# EAGLE board VistelV3 (EAGLE 6.4)
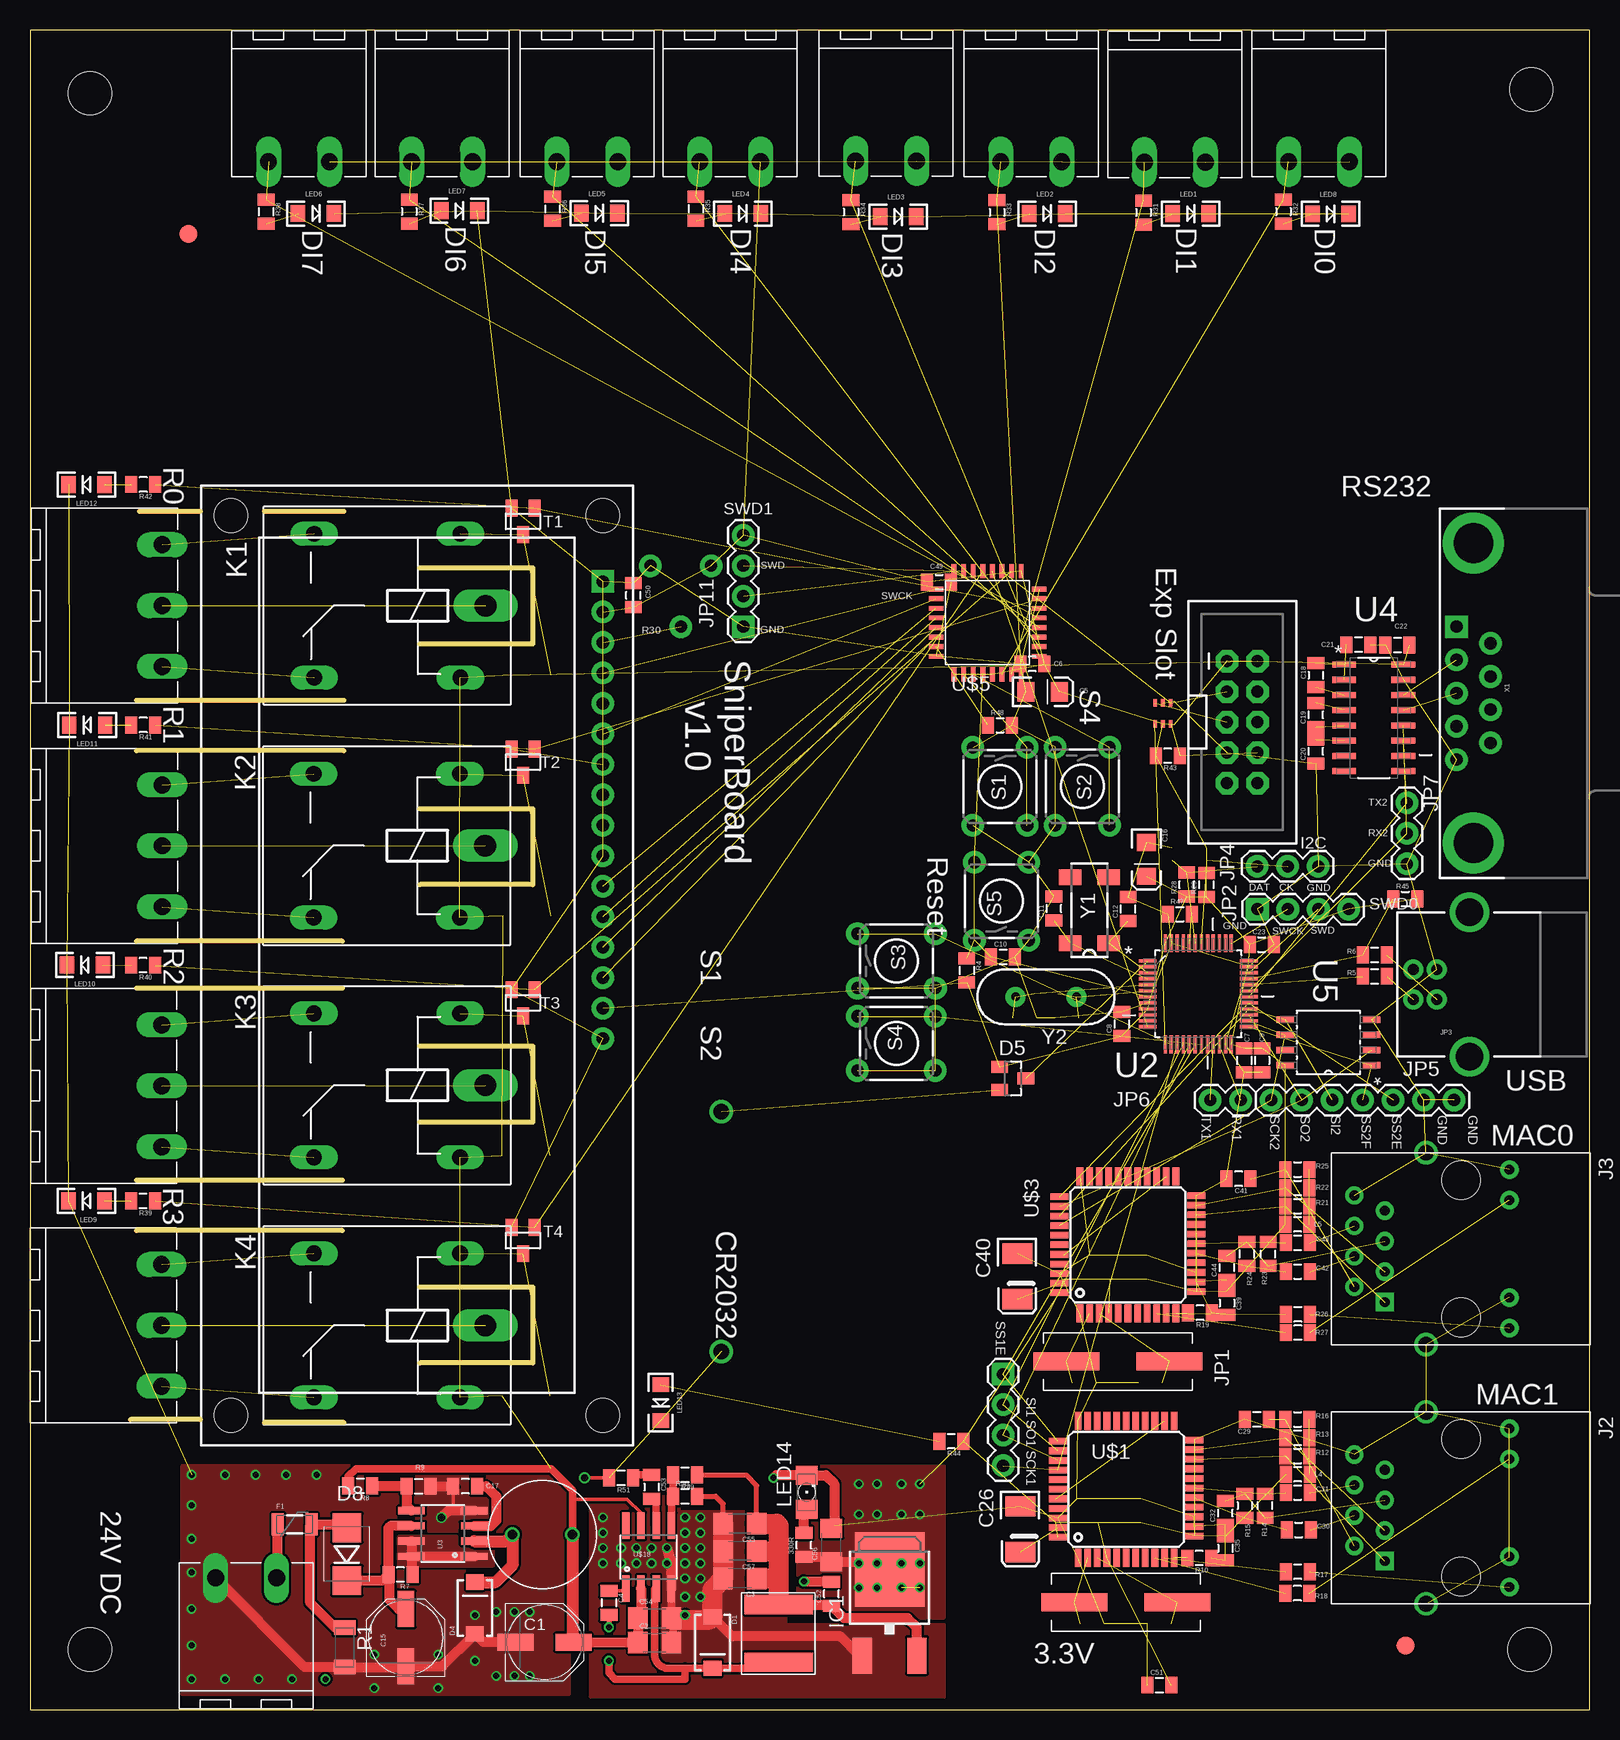
[diagram p0: board, top side]
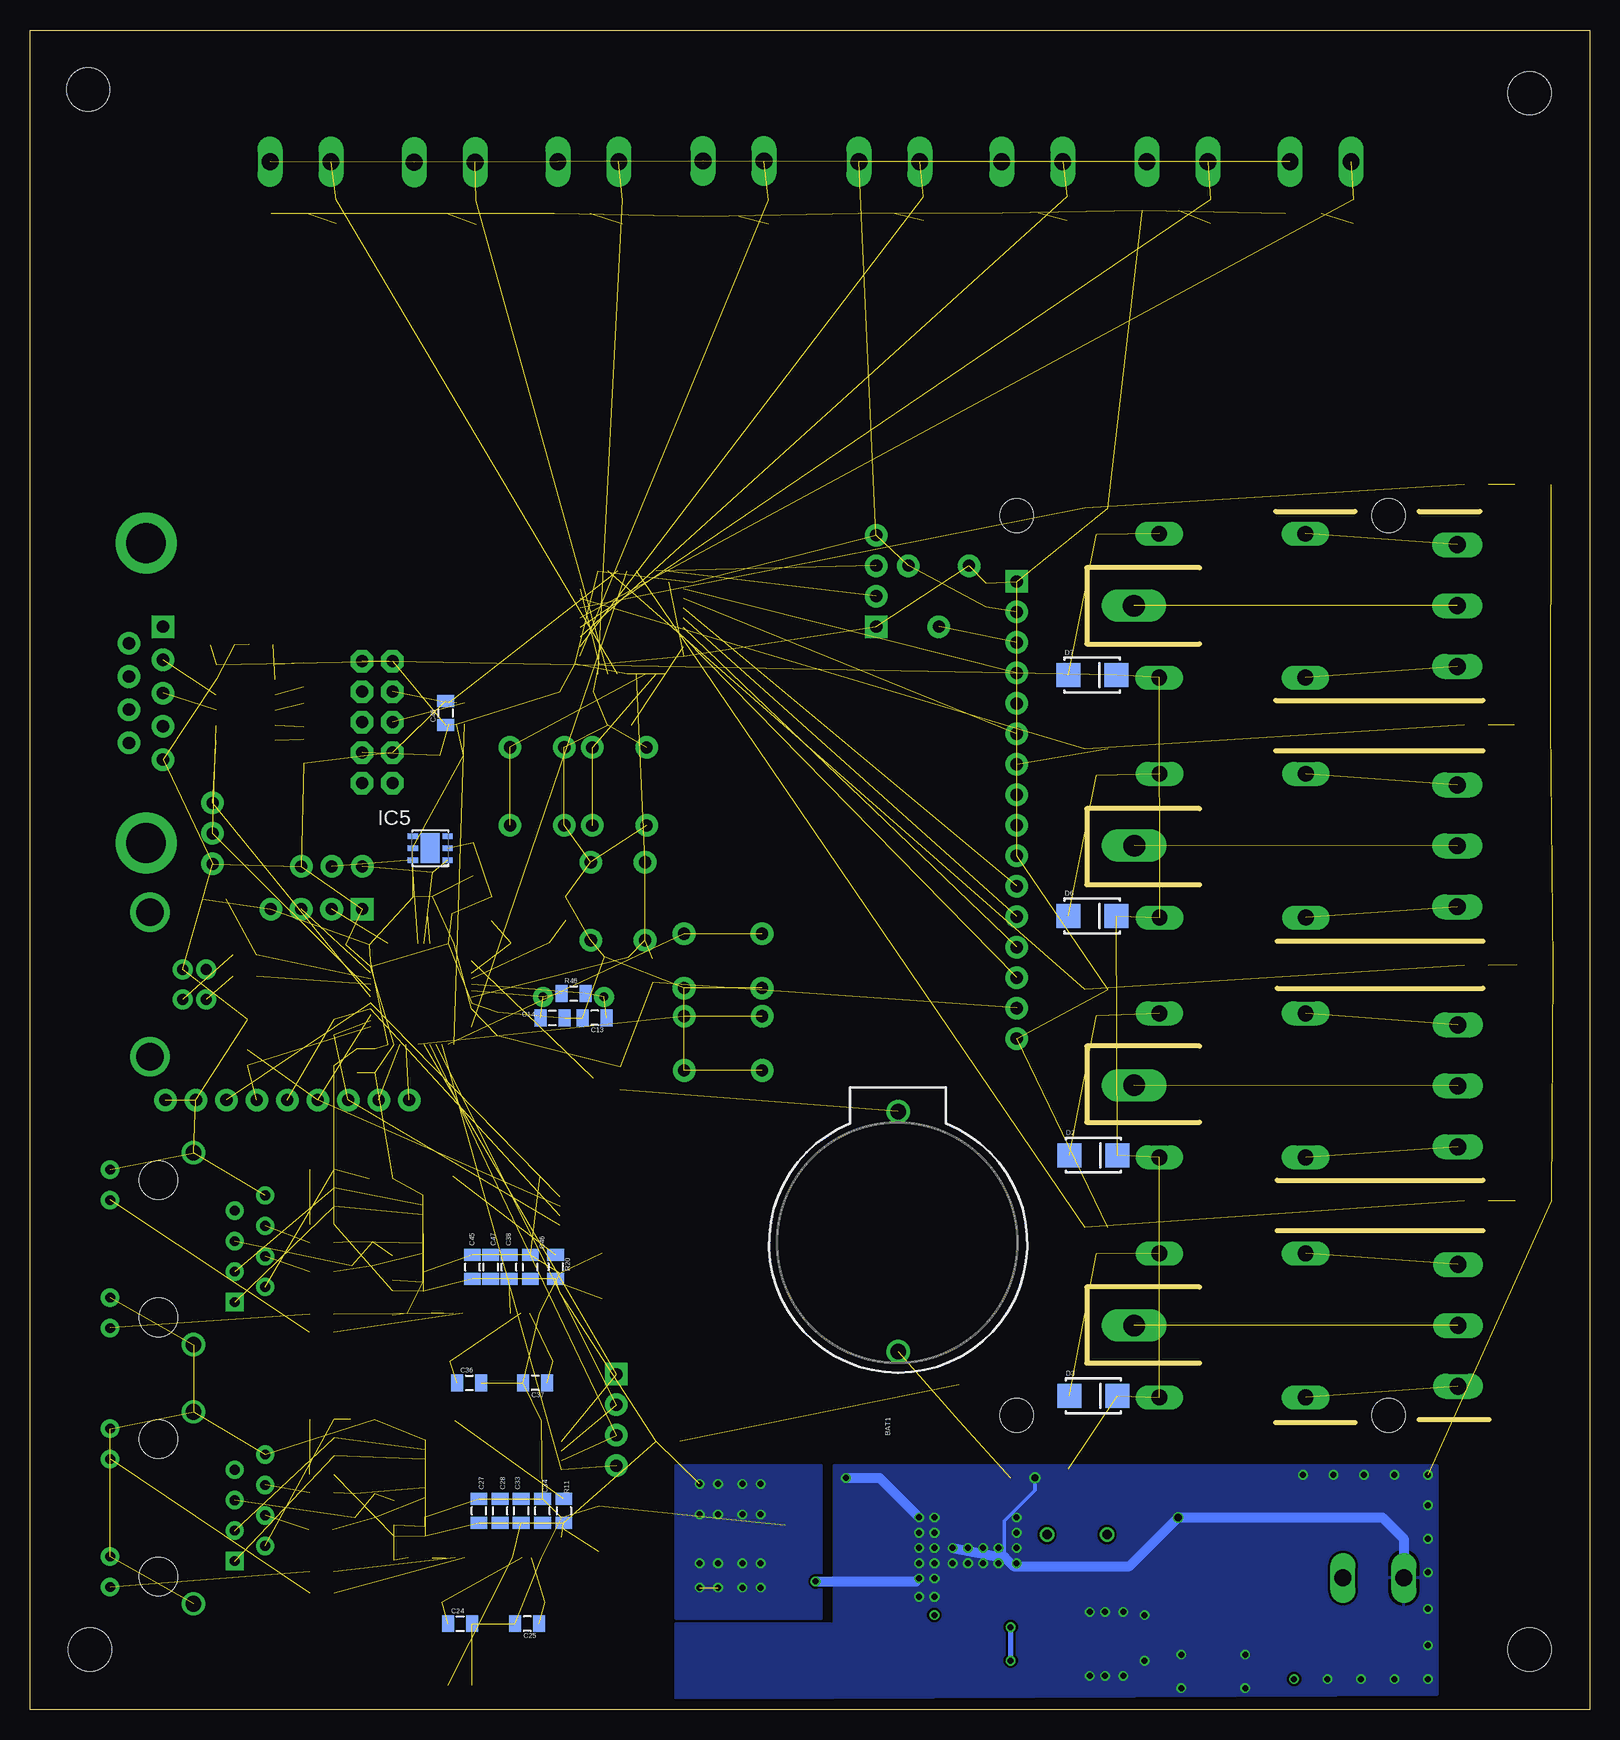
[diagram p1: board, bottom side, seen from below]

Size 130 x 140 mm. Coordinates in mm from the lower left corner, seen from the top.
Outline: 0,0 130,0 130,140 0,140 0,0
Copper layers (1*16): Top 0.035mm / dielectric 1.6mm / Bottom 0.035mm
Design rules "Elecrow_2-layer_PCB_eagle_rule *": minimum track width 8mil, minimum drill 12mil, track to track 8mil, track to pad 8mil, pad to pad 8mil, via to via 8mil, smd to smd 8mil, copper to edge 20mil, drill to drill 10mil, minimum pad ring 6mil, minimum via ring 6mil, stop-mask expansion 0mil, vias tented up to drill 100mil, thermal gap 10mil
Holes 3.6 mm at 5,134.73 125.15,135.05 125,5 5,5
Milling: 22 lines

## Footprints (pad centres in the part's own frame; a part is rotated, then mirrored left to right if it is on the bottom)
0805 = smd 1 x 1.4: 1 -1,0; 2 1,0
BATTCOM_20MM_PTH = drill 1.3: 1 20,0; 2 0,0
PANASONIC_D = smd 3 x 1.4: + 2.4,0; - -2.4,0
1206 = smd 1.6 x 1.8: 1 -1.4,0; 2 1.4,0
EIA3216 = smd 1.4 x 1.6: A 1.4,0; C -1.4,0
EIA3528-KIT = smd 1.7 x 2.5: A 1.9,0; C -1.9,0
SMA-DIODE = smd 1.27 x 1.47: A -2.15,0; C 2.15,0
SMA-DIODE_ALT = smd 2 x 2: A -2,0; C 2,0
SOT23 = smd 1 x 1.4: 1 -0.95,-1.1; 2 0.95,-1.1; 3 0,1.1
SMB-DIODE = smd 2.4 x 2.4: A 2.2,0; C -2.2,0
PTC-1206 = smd 1 x 1.8: 1 -1.4,0; 2 1.4,0
FIDUCIAL-1.5X3 = smd 1.5 x 1.5: 1 0,0
DPACK = smd 1.6 x 3: 1 -2.28,-4.8; 3 2.28,-4.8 | smd 5.8 x 6.2: 4 0,2.38
DFN6-3X3 = smd 0.85 x 0.45: 1 -1.45,1; 2 -1.45,0; 3 -1.45,-1; 4 1.45,-1; 5 1.45,0; 6 1.45,1 | smd 1.6 x 2.5: EXP 0,0
RJ45-ABRACON-111008B = drill 0.813 pad 1.524 square: 1 -6.35,-4.445 | drill 0.813 pad 1.524: 2 -8.89,-3.175; 3 -6.35,-1.905; 4 -8.89,-0.635; 5 -6.35,0.635; 6 -8.89,1.905; 7 -6.35,3.175; 8 -8.89,4.445; 9 4.039,-6.604; 10 4.039,-4.064; 11 4.039,4.064; 12 4.039,6.604 | drill 1.3 pad 1.778: SHIELD0 -2.921,8.001; SHIELD1 -2.921,-8.001 | hole 3.2: 0,-5.715; 0,5.715
1X04 = drill 1.016 pad 1.88 square: 1 0,0 | drill 1.016 pad 1.88: 2 2.54,0; 3 5.08,0; 4 7.62,0
USB-B-PTH = drill 0.914 pad 1.676: D+ 0,1.25; D- 1.981,1.25; GND 0,-1.25; VBUS 1.981,-1.25 | drill 2.286: S1 -2.718,-6.02; S2 -2.718,6.02
1X03 = drill 1.016 pad 1.88: 1 0,0; 2 2.54,0; 3 5.08,0
1X07 = drill 1.016 pad 1.88: 1 0,0; 2 2.54,0; 3 5.08,0; 4 7.62,0; 5 10.16,0; 6 12.7,0; 7 15.24,0
1X02 = drill 1.016 pad 1.88: 1 0,0; 2 2.54,0
2X5-SHROUDED = drill 1.016 pad 1.88 octagon: 1 -1.27,5.08; 2 1.27,5.08; 3 -1.27,2.54; 4 1.27,2.54; 5 -1.27,0; 6 1.27,0; 7 -1.27,-2.54; 8 1.27,-2.54; 9 -1.27,-5.08; 10 1.27,-5.08
ZF112 = drill 1.321 long: 1 -6.096,5.994; 2 -6.096,-5.994; O 6.096,5.994; S 6.096,-5.994 | drill 1.803 long: P -8.204,0
NR6045-IND = smd 1.6 x 5.7: P$1 2.4,0.18; P$2 -2.4,0.19
RLB914-IND = drill 0.8: P$1 -2.5,0; P$2 2.5,0
LED-1206 = smd 1.2 x 1.4: A -1.5,0; C 1.5,0
FKIT-LED-1206 = smd 1.6 x 1.803: A -1.422,0; C 1.422,0
CT/CN1206 = smd 1.2 x 1.8: 1 -1.65,0; 2 1.65,0
TRIM_POT_PTH = drill 1 pad 1.88: 1 -2.54,-2.54; 2 0,2.54; 3 2.54,-2.54
TACTILE-PTH = drill 1.016 pad 1.88: 1 -3.251,2.261; 2 3.251,2.261; 3 -3.251,-2.261; 4 3.251,-2.261
QFP50P900X900X160-48N = smd 1.473 x 0.279: 1 -4.216,2.743; 2 -4.216,2.261; 3 -4.216,1.753; 4 -4.216,1.245; 5 -4.216,0.762; 6 -4.216,0.254; 7 -4.216,-0.254; 8 -4.216,-0.762; 9 -4.216,-1.245; 10 -4.216,-1.753; 11 -4.216,-2.261; 12 -4.216,-2.743; 25 4.216,-2.743; 26 4.216,-2.261; 27 4.216,-1.753; 28 4.216,-1.245; 29 4.216,-0.762; 30 4.216,-0.254; 31 4.216,0.254; 32 4.216,0.762; 33 4.216,1.245; 34 4.216,1.753; 35 4.216,2.261; 36 4.216,2.743 | smd 0.279 x 1.473: 13 -2.743,-4.216; 14 -2.261,-4.216; 15 -1.753,-4.216; 16 -1.245,-4.216; 17 -0.762,-4.216; 18 -0.254,-4.216; 19 0.254,-4.216; 20 0.762,-4.216; 21 1.245,-4.216; 22 1.753,-4.216; 23 2.261,-4.216; 24 2.743,-4.216; 37 2.743,4.216; 38 2.261,4.216; 39 1.753,4.216; 40 1.245,4.216; 41 0.762,4.216; 42 0.254,4.216; 43 -0.254,4.216; 44 -0.762,4.216; 45 -1.245,4.216; 46 -1.753,4.216; 47 -2.261,4.216; 48 -2.743,4.216
SO08 = smd 0.61 x 2.21: 1 -1.905,-2.616; 2 -0.635,-2.616; 3 0.635,-2.616; 4 1.905,-2.616; 5 1.905,2.616; 6 0.635,2.616; 7 -0.635,2.616; 8 -1.905,2.616
SOIC127P600X175-16N = smd 1.981 x 0.508: 1 -2.464,4.445; 2 -2.464,3.175; 3 -2.464,1.905; 4 -2.464,0.635; 5 -2.464,-0.635; 6 -2.464,-1.905; 7 -2.464,-3.175; 8 -2.464,-4.445; 9 2.464,-4.445; 10 2.464,-3.175; 11 2.464,-1.905; 12 2.464,-0.635; 13 2.464,0.635; 14 2.464,1.905; 15 2.464,3.175; 16 2.464,4.445
SOIC127P800X215-8N = smd 1.473 x 0.533: 1 -3.607,1.905; 2 -3.607,0.635; 3 -3.607,-0.635; 4 -3.607,-1.905; 5 3.607,-1.905; 6 3.607,-0.635; 7 3.607,0.635; 8 3.607,1.905
LCD-16X2 = drill 1.016 pad 1.88 square: 1 -32,15.5 | drill 1.016 pad 1.88: 2 -29.46,15.5; 3 -26.92,15.5; 4 -24.38,15.5; 5 -21.84,15.5; 6 -19.3,15.5; 7 -16.76,15.5; 8 -14.22,15.5; 9 -11.68,15.5; 10 -9.14,15.5; 11 -6.6,15.5; 12 -4.06,15.5; 13 -1.52,15.5; 14 1.02,15.5; 15 3.56,15.5; 16 6.1,15.5 | hole 2.8: -37.5,15.5; -37.5,-15.5; 37.5,15.5; 37.5,-15.5
TQFP-44 = smd 1.5 x 0.55: 1 -5.7,4; 2 -5.7,3.2; 3 -5.7,2.4; 4 -5.7,1.6; 5 -5.7,0.8; 6 -5.7,0; 7 -5.7,-0.8; 8 -5.7,-1.6; 9 -5.7,-2.4; 10 -5.7,-3.2; 11 -5.7,-4; 23 5.7,-4; 24 5.7,-3.2; 25 5.7,-2.4; 26 5.7,-1.6; 27 5.7,-0.8; 28 5.7,0; 29 5.7,0.8; 30 5.7,1.6; 31 5.7,2.4; 32 5.7,3.2; 33 5.7,4 | smd 0.55 x 1.5: 12 -3.9,-5.7; 13 -3.1,-5.7; 14 -2.3,-5.7; 15 -1.5,-5.7; 16 -0.7,-5.7; 17 0.1,-5.7; 18 0.9,-5.7; 19 1.7,-5.7; 20 2.5,-5.7; 21 3.3,-5.7; 22 4.1,-5.7; 34 4,5.7; 35 3.2,5.7; 36 2.4,5.7; 37 1.6,5.7; 38 0.8,5.7; 39 0,5.7; 40 -0.8,5.7; 41 -1.6,5.7; 42 -2.4,5.7; 43 -3.2,5.7; 44 -4,5.7
1X02_TERMB_RA = drill 1.4 long: P$1 0,2.54; P$2 0,-2.54
SC70-6 = smd 0.61 x 0.305: P$1 -0.85,0; P$2 0.9,0; P$3 0.9,-0.65; P$4 -0.85,-0.65; P$5 -0.85,-1.3; P$6 0.9,-1.3
LQFP32-7X7 = smd 1.2 x 0.4: 1 -4.3,2.8; 2 -4.3,2; 3 -4.3,1.2; 4 -4.3,0.4; 5 -4.3,-0.4; 6 -4.3,-1.2; 7 -4.3,-2; 8 -4.3,-2.8; 17 4.3,-2.8; 18 4.3,-2; 19 4.3,-1.2; 20 4.3,-0.4; 21 4.3,0.4; 22 4.3,1.2; 23 4.3,2; 24 4.3,2.8 | smd 0.4 x 1.2: 9 -2.8,-4.3; 10 -2,-4.3; 11 -1.2,-4.3; 12 -0.4,-4.3; 13 0.4,-4.3; 14 1.2,-4.3; 15 2,-4.3; 16 2.8,-4.3; 25 2.8,4.3; 26 2,4.3; 27 1.2,4.3; 28 0.4,4.3; 29 -0.4,4.3; 30 -1.2,4.3; 31 -2,4.3; 32 -2.8,4.3
1X03_TERMB_RA = drill 1.4 long: P$1 0,5.08; P$2 0,0; P$3 0,-5.08
DB9 = drill 1.016 pad 1.88 square: 1 -5.54,-1.42 | drill 1.016 pad 1.88: 2 -2.77,-1.42; 3 0,-1.42; 4 2.77,-1.42; 5 5.54,-1.42; 6 -4.15,1.42; 7 -1.38,1.42; 8 1.38,1.42; 9 4.15,1.42 | drill 3.302 pad 5.08: G1 -12.5,0; G2 12.5,0
MC-306 = smd 1.3 x 1.9: 1 -2.75,-1.6; 2 2.75,-1.6; 3 2.75,1.6; 4 -2.75,1.6
HC49US = drill 0.7 pad 1.651: 1 -2.54,0; 2 2.54,0
CRYSTAL-SMD-10.5X4.8-2PIN = smd 5.5 x 1.5: P$1 -4.3,0; P$2 4.3,0

## Placement (x,y rotation side)
330R  10K  [0805]  64.52,13.72 90 top
BAT1  3V  [BATTCOM_20MM_PTH]  57.63,29.84 90 bottom
C1  100uF VZL101M1VTR-0607  [PANASONIC_D]  42.9,5.61 0 top
C2  10uF CC1206ZKY5V7BB106  [1206]  52.07,5.59 0 top
C3  10uF CC1206ZKY5V7BB106  [1206]  59.18,10.92 180 top
C4  10nF  [0805]  48.26,8.89 270 top
C5  10uF  [EIA3216]  84.42,84.84 0 top
C6  0.1uF  [0805]  83.55,87.16 180 top
C7  0.1uF  [0805]  101.21,54.1 270 top
C8  0.1uF  [0805]  91.03,57.15 90 top
C9  0.1uF  [0805]  102.71,54.1 270 top
C10  0.1uF  [0805]  81.12,62.74 0 top
C11  20pF  [0805]  85.36,66.77 90 top
C12  20pF  [0805]  91.53,66.74 90 top
C13  27pF  [0805]  82.93,57.65 180 bottom
C14  27pF  [0805]  86.45,57.66 0 bottom
C15  100uF VZL101M1VTR-0607  [PANASONIC_D]  31.33,5.99 90 top
C16  10uF  [EIA3216]  93.06,70.87 270 top
C17  420pF  [0805]  36.28,18.62 180 top
C18  0.1uF  [0805]  107.19,86.22 270 top
C19  0.1uF  [0805]  107.19,82.92 90 top
C20  0.1uF  [0805]  107.19,79.87 90 top
C21  0.1uF  [0805]  110.74,88.76 180 top
C22  0.1uF  [0805]  114,88.74 0 top
C23  0.1uF  [0805]  102.67,63.77 0 top
C24  27pF  [0805]  94.14,7.16 0 bottom
C25  27pF  [0805]  88.55,7.16 180 bottom
C26  10uF  [EIA3528-KIT]  82.55,15.03 270 top
C27  0.1uF  [0805]  92.59,16.56 90 bottom
C28  0.1uF  [0805]  90.81,16.56 90 bottom
C29  0.01uF  [0805]  102.27,24.18 180 top
C30  0.01uF  [0805]  105.75,14.97 0 top
C31  0.01uF  [0805]  105.67,18.08 0 top
C32  0.01uF  [0805]  99.65,16.38 90 top
C33  0.1uF  [0805]  89.06,16.56 90 bottom
C34  0.1uF  [0805]  87.28,16.56 90 bottom
C35  0.1uF  [0805]  99.65,13.43 270 top
C36  27pF  [0805]  93.38,27.23 0 bottom
C37  27pF  [0805]  87.89,27.23 180 bottom
C38  0.1uF  [0805]  90.07,36.88 90 bottom
C39  0.1uF  [0805]  99.78,33.88 270 top
C40  10uF  [EIA3528-KIT]  82.3,36.12 270 top
C41  0.01uF  [0805]  100.74,44.24 180 top
C42  0.01uF  [0805]  105.67,36.5 0 top
C43  0.01uF  [0805]  105.67,38.91 0 top
C44  0.01uF  [0805]  99.78,36.83 90 top
C45  0.1uF  [0805]  93.12,36.88 90 bottom
C46  0.1uF  [0805]  88.3,36.88 90 bottom
C47  0.1uF  [0805]  91.6,36.88 90 bottom
C48  0.1uF  [0805]  95.34,83.06 90 bottom
C49  0.1uF  [0805]  75.79,93.98 0 top
C50  0.1uF  [0805]  50.29,92.88 90 top
C51  0.1uF  [0805]  94.15,2.03 0 top
C52  0.1uF  [0805]  66.8,9.65 90 top
C53  1.5nF  [0805]  51.82,18.54 270 top
C54  10uF CC1206ZKY5V7BB106  [1206]  52.07,7.62 0 top
C55  10uF CC1206ZKY5V7BB106  [1206]  59.18,15.49 180 top
C56  10uF CC1206ZKY5V7BB106  [1206]  66.8,13.72 90 top
C57  10uF CC1206ZKY5V7BB106  [1206]  59.18,13.21 180 top
D1  [SMA-DIODE]  56.9,5.59 270 top
D2  1N4148WS-V-GS18  [SMA-DIODE_ALT]  41.35,46.21 0 bottom
D3  1N4148WS-V-GS18  [SMA-DIODE_ALT]  41.35,26.14 0 bottom
D4  IN5819  [SMA-DIODE]  37.09,8.47 90 top
D5  BAS40-05  [SOT23]  81.93,52.6 270 top
D6  1N4148WS-V-GS18  [SMA-DIODE_ALT]  41.45,66.16 0 bottom
D7  1N4148WS-V-GS18  [SMA-DIODE_ALT]  41.45,86.22 0 bottom
D8  1N5819  [SMB-DIODE]  26.42,12.95 90 top
F1  0ZCJ0020FF2E  [PTC-1206]  22.06,15.43 0 top
FID1  FIDUCIAL1.5X3  [FIDUCIAL-1.5X3]  114.65,5.33 0 top
FID2  FIDUCIAL1.5X3  [FIDUCIAL-1.5X3]  13.22,123 0 top
IC1  LD117ADT33TR  [DPACK]  71.65,9.29 0 top
IC5  SI7006-A10-IM  [DFN6-3X3]  96.64,71.8 180 bottom
J2  RJ45-ABRACON-11108B  [RJ45-ABRACON-111008B]  119.28,16.81 0 top
J3  RJ45-ABRACON-11108B  [RJ45-ABRACON-111008B]  119.28,38.4 0 top
JP1  [1X04]  81.12,27.94 270 top
JP2  SWD0  [1X04]  102.31,66.72 0 top
JP3  USB-B  [USB-B-PTH]  117.28,60.44 180 top
JP4  [1X03]  107.38,70.28 180 top
JP5  [1X07]  118.71,50.8 180 top
JP6  [1X02]  100.93,50.8 180 top
JP7  [1X03]  114.78,70.48 90 top
JP11  [1X04]  59.47,90.26 90 top
JP12  M05X2SHD  [2X5-SHROUDED]  101.05,82.31 0 top
K1  ZF112  [ZF112]  29.77,92.01 180 top
K2  ZF112  [ZF112]  29.74,72 180 top
K3  ZF112  [ZF112]  29.76,52.03 180 top
K4  ZF112  [ZF112]  29.76,32.01 180 top
L1  22uH NR6045T220M  [NR6045-IND]  62.23,6.35 270 top
L3  220uH RLB0914-221KL  [RLB914-IND]  42.72,14.57 0 top
L4  10uH  [0805]  105.67,19.61 180 top
L5  10uH  [0805]  105.67,40.43 180 top
LED1  Green  [LED-1206]  96.76,124.69 0 top
LED2  Green  [LED-1206]  84.8,124.69 0 top
LED3  Green  [LED-1206]  72.38,124.45 0 top
LED4  Green  [LED-1206]  59.42,124.7 0 top
LED5  Green  [LED-1206]  47.45,124.72 0 top
LED6  Green  [LED-1206]  23.85,124.7 0 top
LED7  Green  [LED-1206]  35.78,124.94 0 top
LED8  Green  [LED-1206]  108.41,124.67 0 top
LED9  Green  [LED-1206]  4.7,42.4 180 top
LED10  Green  [LED-1206]  4.57,62.05 180 top
LED11  Green  [LED-1206]  4.77,82.07 180 top
LED12  Green  [LED-1206]  4.71,102.11 180 top
LED13  Green  [LED-1206]  52.58,25.57 270 top
LED14  [FKIT-LED-1206]  64.74,18.11 90 top
R1  VC120645K900RP  [CT/CN1206]  26.24,5.18 270 top
R4  10K  [0805]  78.09,61.61 270 top
R5  22R  [0805]  112.09,61.12 0 top
R6  22R  [0805]  112.08,62.9 0 top
R7  0.68R  [0805]  30.88,11.25 180 top
R8  13K  [0805]  27.54,18.63 180 top
R9  1.5K  [0805]  32.4,18.62 0 top
R10  12.4K  [0805]  97.47,12.63 180 top
R11  100K  [0805]  85.5,16.56 270 bottom
R12  49.9R  [0805]  105.67,21.13 0 top
R13  49.9R  [0805]  105.67,22.65 0 top
R14  49.9R  [0805]  102.95,16.99 90 top
R15  49.9R  [0805]  101.27,16.99 270 top
R16  10R  [0805]  105.67,24.18 0 top
R17  470R  [0805]  105.67,11.48 180 top
R18  470R  [0805]  105.64,9.7 180 top
R19  12.4K  [0805]  97.54,33.07 180 top
R20  100K  [0805]  86.19,36.91 270 bottom
R21  49.9R  [0805]  105.67,41.96 0 top
R22  49.9R  [0805]  105.67,43.48 0 top
R23  49.9R  [0805]  103.2,37.97 90 top
R24  49.9R  [0805]  101.43,37.97 270 top
R25  10R  [0805]  105.67,45.01 0 top
R26  470R  [0805]  105.69,32.94 180 top
R27  470R  [0805]  105.69,31.42 180 top
R28  10K  [0805]  96.42,68.76 90 top
R29  10K  [0805]  98.08,68.75 90 top
R30  TRIMPOT 10K  [TRIM_POT_PTH]  54.25,92.8 180 top
R31  470R  [0805]  92.83,124.79 270 top
R32  470R  [0805]  104.49,124.85 270 top
R33  470R  [0805]  80.61,124.8 270 top
R34  470R  [0805]  68.44,124.82 270 top
R35  470R  [0805]  55.51,125.11 270 top
R36  470R  [0805]  43.56,125.09 270 top
R37  470R  [0805]  31.62,124.86 270 top
R38  470R  [0805]  19.68,124.85 270 top
R39  470R  [0805]  9.42,42.39 180 top
R40  470R  [0805]  9.42,62.04 180 top
R41  470R  [0805]  9.43,82.07 180 top
R42  470R  [0805]  9.43,102.12 180 top
R43  10K  [0805]  94.84,79.5 180 top
R44  470R  [0805]  76.8,22.35 180 top
R45  1.5K  [0805]  114.65,67.56 0 top
R46  1M  [0805]  84.68,59.69 0 bottom
R47  100K  [0805]  95.85,66.29 0 top
R48  100K  [0805]  80.87,82.04 0 top
R49  15.5K  [0805]  54.61,19.56 180 top
R50  10K  [0805]  54.61,17.78 0 top
R51  12K  [0805]  49.28,19.3 180 top
S1  [TACTILE-PTH]  80.86,76.95 270 top
S2  [TACTILE-PTH]  87.72,76.96 270 top
S3  [TACTILE-PTH]  72.23,62.4 0 top
S4  [TACTILE-PTH]  72.22,55.53 0 top
S5  [TACTILE-PTH]  80.99,67.38 90 top
T1  MOSFET-NCHANNELBSS123LT1G  [SOT23]  41.1,99.04 180 top
T2  MOSFET-NCHANNELBSS123LT1G  [SOT23]  41.1,78.97 180 top
T3  MOSFET-NCHANNELBSS123LT1G  [SOT23]  41.1,58.91 180 top
T4  MOSFET-NCHANNELBSS123LT1G  [SOT23]  41.1,39.09 180 top
U2  STM32F103CBT6  [QFP50P900X900X160-48N]  97.39,59.66 0 top
U3  MC34063SMD  [SO08]  34.42,14.67 90 top
U4  ST232CDR  [SOIC127P600X175-16N]  112.01,82.66 0 top
U5  S25FL016K0XMFI011  [SOIC127P800X215-8N]  108.23,55.61 180 top
U6  LCD-16X2SILK  [LCD-16X2]  32.25,62.03 270 top
U$1  ENC424J600  [TQFP-44]  91.37,18.36 90 top
U$2  1X02_TERMB_RA  [1X02_TERMB_RA]  18.01,10.97 270 top
U$3  ENC424J600  [TQFP-44]  91.52,38.73 90 top
U$4  NC7SP157  [SC70-6]  95.09,83.06 270 top
U$5  STM32F030K6T6  [LQFP32-7X7]  79.83,90.6 90 top
U$6  1X02_TERMB_RA  [1X02_TERMB_RA]  107.45,129.03 90 top
U$7  1X02_TERMB_RA  [1X02_TERMB_RA]  95.43,128.98 90 top
U$8  1X02_TERMB_RA  [1X02_TERMB_RA]  71.36,129.08 90 top
U$9  1X02_TERMB_RA  [1X02_TERMB_RA]  46.45,129.03 90 top
U$10  1X02_TERMB_RA  [1X02_TERMB_RA]  22.42,129.03 90 top
U$11  1X02_TERMB_RA  [1X02_TERMB_RA]  34.35,129.03 90 top
U$12  1X02_TERMB_RA  [1X02_TERMB_RA]  58.37,129.03 90 top
U$13  1X02_TERMB_RA  [1X02_TERMB_RA]  83.46,129.03 90 top
U$14  1X03_TERMB_RA  [1X03_TERMB_RA]  11.02,92.02 180 top
U$15  1X03_TERMB_RA  [1X03_TERMB_RA]  11.02,71.99 180 top
U$16  1X03_TERMB_RA  [1X03_TERMB_RA]  10.98,51.99 180 top
U$17  1X03_TERMB_RA  [1X03_TERMB_RA]  10.96,32.02 180 top
U$18  ACT4060A  [SO08]  51.56,12.7 0 top
X1  [DB9]  120.33,84.72 270 top
Y1  32.768Khz  [MC-306]  88.31,66.63 90 top
Y2  8Mhz  [HC49US]  84.69,59.4 180 top
Y3  25Mhz  [CRYSTAL-SMD-10.5X4.8-2PIN]  91.34,8.94 180 top
Y4  25Mhz  [CRYSTAL-SMD-10.5X4.8-2PIN]  90.68,29 180 top

## Library data of the parts
330R C2-C4 C17-C22 C51-C57 L1 L3-L5 R7-R9 R31-R44 R48-R51 = SparkFun-Passives
BAT1 R30 S1-S5 = SparkFun-Electromechanical
C1 C6-C15 C23-C50 = SparkFun-Capacitors
C5 C16 = SparkFun-Capacitors; PROD_ID: CAP-00811
D1 = SparkFun-DiscreteSemi; PROD_ID: DIO-09886
D2-D4 D6-D8 = SparkFun-DiscreteSemi
D5 = diode
F1 U3 = SparkFun-PowerIC
FID1 FID2 = SparkFun-Aesthetics
IC1 = v-reg
IC5 = si70xx-10; MF: Silicon Labs; MPN: Si7006-A10-IM; OC_FARNELL: unknown; OC_NEWARK: unknown
J2 J3 = Connector
JP1 JP2 JP4-JP7 JP11 JP12 U$2 U$6-U$17 X1 = SparkFun-Connectors
JP3 = SparkFun-Connectors; PROD_ID: CONN-08278
K1-K4 = relay; OC_FARNELL: unknown; OC_NEWARK: unknown
LED1-LED14 = SparkFun-LED
R1 = varistor
R4-R6 R10-R29 R45-R47 = SparkFun-Resistors
T1-T4 = SparkFun-DiscreteSemi; PROD_ID: TRANS-08345
U2 = ST Microelctronics_By_element14_Batch_1; MPN: STM32F103CBT6; OC_FARNELL: 1606327; OC_NEWARK: 11N8296; PACKAGE: QFP-48; SUPPLIER: STMICROELECTRONICS
U4 = ST Microelctronics_By_element14_Batch_1; MPN: ST232CDR; OC_FARNELL: 1564303; OC_NEWARK: 89K0993; PACKAGE: SOIC-16; SUPPLIER: STMICROELECTRONICS
U5 = Spansion_By_element14_Batch_1; MPN: S25FL016K0XMFI011; OC_FARNELL: 1861628; OC_NEWARK: 27T2971; PACKAGE: SOIC-8; SUPPLIER: SPANSION
U6 = SparkFun-Displays
U$1 U$3 = microchip-encx24j600
U$4 = nxp_60
U$5 = STM32F030K6T6
U$18 = VistelV3
Y1 = crystal; MPN: MC-306 60.0KHZ 100PPM ,12.5PF; OC_FARNELL: 1278040; OC_NEWARK: 31M5576
Y2-Y4 = SparkFun-FreqCtrl

## Nets
3.3V: 330R.1 C5.A C6.1 C7.1 C8.1 C9.1 C16.A C22.2 C23.1 C27.1 C28.1 C33.1 C34.1 C35.1 C38.1 C39.1 C45.1 C46.1 C47.1 C48.1 C49.1 C50.1 C51.2 C56.1 D5.1 IC1.4 IC5.5 JP2.4 JP11.4 JP12.1 L4.2 L5.2 R4.2 R11.2 R20.2 R28.1 R29.1 R30.1 R43.2 R44.1 R45.2 U2.9 U2.24 U2.36 U2.48 U4.16 U5.8 U6.2 U6.15 U$1.4 U$1.12 U$1.15 U$1.18 U$1.44 U$3.4 U$3.12 U$3.15 U$3.18 U$3.44 U$4.P$3 U$5.1 U$5.5 U$5.17 U$6.P$2 U$7.P$2 U$8.P$2 U$9.P$2 U$10.P$2 U$11.P$2 U$12.P$2 U$13.P$2
232_RX: U4.13 X1.3
232_TX: U4.14 X1.2
+5V: C3.1 C52.1 C55.1 C57.1 IC1.3 L1.P$2 R49.1
+12V: C1.+ C2.1 C54.1 D2.C D3.C D6.C D7.C JP12.2 K1.1 K2.1 K3.1 K4.1 L3.P$2 R8.2 U$18.2 U$18.7
BOOT0: R47.2 U2.44
DAISY_MUX: JP12.5 U$4.P$5
DAISY_RX0: U2.13 U$4.P$6
DAISY_RX1: U2.12 U$5.20
DAISY_RX2: JP12.3 U$4.P$1 U$5.19
DI_0: R32.1 U$5.6 U$6.P$1
DI_1: R31.1 U$5.7 U$7.P$1
DI_2: R33.1 U$5.8 U$13.P$1
DI_3: R34.1 U$5.9 U$8.P$1
DI_4: R35.1 U$5.10 U$12.P$1
DI_5: R36.1 U$5.11 U$9.P$1
DI_6: R37.1 U$5.12 U$11.P$1
DI_7: R38.1 U$5.13 U$10.P$1
DO_0: R42.1 T1.1 U$5.14
DO_1: R41.1 T2.1 U$5.15
DO_2: R40.1 T3.1 U$5.18
DO_3: R39.1 T4.1 U$5.21
G_RESET: C10.1 R4.1 S5.1 S5.2 U2.7 U$5.4
GND: BAT1.2 C1.- C2.2 C3.2 C5.C C6.2 C7.2 C8.2 C9.2 C10.2 C11.2 C12.2 C13.2 C14.2 C15.- C16.C C17.2 C20.1 C21.1 C22.1 C23.2 C24.2 C25.2 C26.C C27.2 C28.2 C29.2 C32.1 C33.2 C34.2 C35.2 C36.2 C37.2 C38.2 C39.2 C40.C C41.2 C44.1 C45.2 C46.2 C47.2 C48.2 C49.2 C50.2 C51.1 C52.2 C54.2 C55.2 C56.2 C57.2 D1.A D4.A IC1.1 IC5.2 J2.8 J2.10 J2.12 J2.SHIELD0 J2.SHIELD1 J3.8 J3.10 J3.12 J3.SHIELD0 J3.SHIELD1 JP2.1 JP3.GND JP4.1 JP5.1 JP5.2 JP7.1 JP11.1 JP12.7 LED1.C LED2.C LED3.C LED4.C LED5.C LED6.C LED7.C LED8.C LED9.C LED10.C LED11.C LED12.C LED13.C LED14.C R1.2 R9.2 R10.1 R19.1 R30.3 R47.1 R48.2 R50.2 R51.2 S1.3 S1.4 S2.3 S2.4 S3.3 S3.4 S4.3 S4.4 S5.3 S5.4 T1.2 T2.2 T3.2 T4.2 U2.8 U2.23 U2.35 U2.47 U3.4 U4.15 U5.4 U6.1 U6.5 U6.7 U6.8 U6.9 U6.10 U6.16 U$1.1 U$1.13 U$1.14 U$1.19 U$1.22 U$1.33 U$1.42 U$2.P$2 U$3.1 U$3.13 U$3.14 U$3.19 U$3.22 U$3.33 U$3.42 U$4.P$4 U$5.16 U$5.32 U$18.4 X1.5
I2C1_SCL: IC5.6 JP4.2 R29.2 U2.42
I2C1_SDA: IC5.1 JP4.3 R28.2 U2.43
LA1: J2.9 R17.1
LA2: J3.9 R26.1
LB1: J2.11 R18.1
LB2: J3.11 R27.1
LCD_D4: U6.11 U$5.27
LCD_D5: U6.12 U$5.28
LCD_D6: U6.13 U$5.29
LCD_D7: U6.14 U$5.30
LCD_E: U6.6 U$5.26
LCD_RS: U6.4 U$5.25
N$1: K1.P U$14.P$2
N$3: BAT1.1 D5.2
N$4: F1.1 U$2.P$1
N$5: D8.A F1.2 R1.1
N$6: C4.1 U$18.1
N$7: C14.1 R46.1 U2.6 Y2.1
N$8: LED13.A R44.2
N$9: LED7.A R37.2
N$10: JP3.D- R5.2
N$11: JP3.D+ R6.2
N$12: R30.2 U6.3
N$13: K4.O U$17.P$1
N$14: C12.1 U2.3 Y1.1
N$15: C11.1 U2.4 Y1.4
N$16: C13.1 R46.2 U2.5 Y2.2
N$17: R48.1 U$5.31
N$18: C4.2 D1.C L1.P$1 U$18.3
N$19: R49.2 R50.1 U$18.5
N$20: 330R.2 LED14.A
N$21: K4.S U$17.P$3
N$22: C17.1 U3.3
N$23: C53.2 U$18.6
N$24: D4.C L3.P$1 U3.2
N$25: R8.1 R9.1 U3.5
N$26: C21.2 U4.2
N$27: C20.2 U4.6
N$28: C18.2 U4.3
N$29: C18.1 U4.1
N$30: C19.1 U4.5
N$31: C19.2 U4.4
N$32: C53.1 R51.1
N$33: C24.1 U$1.3 Y3.P$1
N$34: C40.A U$3.43
N$35: C37.1 U$3.2 Y4.P$2
N$36: C30.1 R15.2 U$1.16
N$37: C26.A U$1.43
N$38: C31.1 R14.2 U$1.17
N$39: R19.2 U$3.11
N$40: C25.1 U$1.2 Y3.P$2
N$41: R10.2 U$1.11
N$42: R11.1 U$1.24
N$43: R17.2 U$1.10
N$44: R18.2 U$1.9
N$45: L4.1 R12.2 R13.2 R16.2
N$46: R20.1 U$3.24
N$47: C36.1 U$3.3 Y4.P$1
N$48: C42.1 R24.2 U$3.16
N$49: C43.1 R23.2 U$3.17
N$50: L5.1 R21.2 R22.2 R25.2
N$51: R26.2 U$3.10
N$52: R27.2 U$3.9
N$53: K3.S U$16.P$3
N$54: K2.P U$15.P$2
N$55: K3.O U$16.P$1
N$56: K2.O U$15.P$1
N$57: K2.S U$15.P$3
N$58: K3.P U$16.P$2
N$59: K1.O U$14.P$1
N$60: K4.P U$17.P$2
N$61: K1.S U$14.P$3
N$62: D7.A K1.2 T1.3
N$63: D6.A K2.2 T2.3
N$64: D2.A K3.2 T3.3
N$65: D3.A K4.2 T4.3
N$66: LED12.A R42.2
N$67: LED11.A R41.2
N$69: JP11.3 U$5.23
N$70: LED10.A R40.2
N$71: JP11.2 U$5.24
N$72: LED9.A R39.2
N$73: LED1.A R31.2
N$74: LED8.A R32.2
N$75: LED2.A R33.2
N$77: JP12.8 R43.1 U$4.P$2
N$78: LED3.A R34.2
N$80: LED5.A R36.2
N$82: LED4.A R35.2
N$87: LED6.A R38.2
RX1+: C30.2 J2.4
RX1-: C31.2 J2.6
RX1_CT: C32.2 J2.5 R14.1 R15.1
RX2+: C42.2 J3.4
RX2-: C43.2 J3.6
RX2_CT: C44.2 J3.5 R23.1 R24.1
SPI1_MISO: JP1.2 U2.16 U$1.35
SPI1_MOSI: JP1.3 U2.17 U$1.36
SPI1_SCK: JP1.4 U2.15 U$1.37
SPI1_SS1_ETH1: JP1.1 U2.18 U$1.34
SPI2_MISO: JP5.6 U2.27 U5.2 U$3.35
SPI2_MOSI: JP5.5 U2.28 U5.5 U$3.36
SPI2_SCK: JP5.7 U2.26 U5.6 U$3.37
SPI2_SS1_ETH2: JP5.3 U2.29 U$3.34
SPI2_SS2_FLASH: JP5.4 U2.25 U5.1
SW0: S1.1 S1.2 U$5.2
SW1: S2.1 S2.2 U$5.3
SW2: S3.1 S3.2 U2.14
SW3: S4.1 S4.2 U2.19
SWDCLK: JP2.2 U2.37
SWDIO: JP2.3 U2.34
TX1+: J2.1 R12.1 U$1.20
TX1-: J2.3 R13.1 U$1.21
TX1_CT: C29.1 J2.2 R16.1
TX2+: J3.1 R21.1 U$3.20
TX2-: J3.3 R22.1 U$3.21
TX2_CT: C41.1 J3.2 R25.1
UART_RX1: JP6.1 U2.22
UART_RX2: JP7.2 U2.31 U4.12
UART_TX1: JP6.2 U2.21
UART_TX2: JP7.3 U2.30 U4.11
USB_D+: R6.1 R45.1 U2.33
USB_D-: R5.1 U2.32
VBAT: D5.3 U2.1
VIN: C15.+ D8.C R7.2 U3.6
VIN2: R7.1 U3.1 U3.7 U3.8

## Tracks (layer width: path | path; a pad name or v marks a point on that pad's centre or on a via)
3.3V  (via drill 0.5)  (69 unrouted)
  Top 0.813: 330R.1 66.4,12.72 C56.1 71.01,12.32 IC1.4
  other vias: 69.09,18.8 70.61,18.8 72.64,18.8 74.17,18.8 69.09,16.26 70.61,16.26 72.64,16.26 74.17,16.26 69.09,12.19 70.61,12.19 72.64,12.19 74.17,12.19 69.09,10.16 70.61,10.16 72.64,10.16 74.17,10.16
  pour Bottom: 64.01,20.32 76.2,20.32 76.2,7.62 64.01,7.62
  pour Top (no thermals): 64.01,20.32 76.2,20.32 76.2,7.62 64.01,7.62
232_RX  (1 unrouted)
232_TX  (1 unrouted)
+5V
  Top 0.406: R49.1 59.69,19.56 60.58,18.67 C55.1
  Top 0.813: IC1.3 73.93,6.84 73.15,7.62 67.83,7.62 C52.1 66.7,8.75 L1.P$2
  Top 1.676: L1.P$2 62.42,11.18 | 62.42,11.18 62.42,12.95 | 62.42,12.95 62.42,15.3 62.23,15.49 C55.1 | C57.1 62.17,13.21 62.42,12.95 | C3.1 62.17,10.92 62.42,11.18
+12V  (9 unrouted)
  Top 0.305: U$18.7 50.93,16.38 49.78,17.53 45.48,17.53 45.22,17.78 | 45.21,14.58 L3.P$2
  Top 0.61: R8.2 26.54,19.42 27.18,20.07 43.43,20.07 45.22,18.28 45.22,17.78 L3.P$2
  Top 0.813: C1.+ 50.65,5.61 C2.1 C54.1 50.93,7.88 U$18.2
  Top 1.016: L3.P$2 45.22,5.68 C1.+
BOOT0  (1 unrouted)
DAISY_MUX  (1 unrouted)
DAISY_RX0  (1 unrouted)
DAISY_RX1  (1 unrouted)
DAISY_RX2  (2 unrouted)
DI_0  (2 unrouted)
DI_1  (2 unrouted)
DI_2  (2 unrouted)
DI_3  (2 unrouted)
DI_4  (2 unrouted)
DI_5  (2 unrouted)
DI_6  (2 unrouted)
DI_7  (2 unrouted)
DO_0  (2 unrouted)
DO_1  (2 unrouted)
DO_2  (2 unrouted)
DO_3  (2 unrouted)
G_RESET  (5 unrouted)
GND  (via drill 0.5, 0.6)  (122 unrouted)
  Top 0.305: R51.2 v46.23,19.3 | C17.2 35.28,16.6 35.31,16.58
  Top 0.406: R50.2 57.15,17.78 57.78,17.15 C55.2
  Top 0.61: U$18.4 C54.2 53.59,7.5 53.59,5.59 C2.2
  Top 0.813: U$2.P$2 22.92,3.53 R1.2 31.27,3.53 C15.- 34.36,3.59 D4.A 37.8,5.61 C1.- | R9.2 C17.2 | U3.4 35.31,16.58 34.87,16.58 v34.29,16 | U$18.4 53.47,12.32 v53.09,13.46 | IC1.1 69.17,4.49 67.56,6.1 58.54,6.1 D1.A | C56.2 67.06,15.37 67.06,18.8 66.32,19.53 LED14.C 62.2,19.53 v61.98,19.3 | C52.2 64.53,10.65 v64.52,10.67
  Top 1.676: C55.2 C57.2 C3.2 56.9,10.04 D1.A 56.65,7.5 53.59,7.5
  Bottom 0.305: v46.23,19.3 46.23,18.29 48.77,15.75 48.77,12.95 49.02,12.7
  Bottom 0.813: U$2.P$2 15.49,10.99 15.49,14.22 17.27,16 v34.29,16 38.35,11.94 48.01,11.94 48.77,12.7 49.02,12.7 v53.09,13.46 | v64.52,10.67 56.13,10.67 v55.88,10.92 | v61.98,19.3 59.18,19.3 v55.88,16
  other vias: 13.46,19.56 13.46,17.02 13.46,14.22 13.46,11.43 13.46,8.38 13.46,5.33 13.46,2.54 16.26,2.54 19.05,2.54 21.84,2.54 16.26,19.56 18.8,19.56 21.34,19.56 23.88,19.56 28.7,4.57 28.7,1.78 34.04,1.78 34.04,4.57 37.08,7.87 37.08,4.06 38.86,8.13 38.86,2.79 40.39,8.13 40.39,2.79 41.66,8.13 41.66,2.79 47.75,16 47.75,14.73 47.75,13.46 47.75,12.19 49.28,13.46 49.28,12.19 50.55,13.46 50.55,12.19 51.82,13.46 51.82,12.19 53.09,12.19 54.61,16 54.61,14.73 55.88,14.73 54.61,13.46 55.88,13.46 54.61,12.19 55.88,12.19 54.61,10.92 54.61,9.4 55.88,9.4
  pour Bottom: 12.7,20.32 62.99,20.32 62.99,7.11 76.2,7.11 76.2,6.1 76.2,1.02 62.99,1.02 12.7,1.27
  pour Top (no thermals): 46.74,17.78 54.1,17.78 54.1,16.51 62.99,16.51 62.99,7.11 76.2,7.11 76.2,1.02 46.74,1.02
  pour Top (rank 6, no thermals): 12.7,20.32 44.96,20.32 44.96,1.27 12.7,1.27
I2C1_SCL  (3 unrouted)
I2C1_SDA  (3 unrouted)
LA1  (1 unrouted)
LA2  (1 unrouted)
LB1  (1 unrouted)
LB2  (1 unrouted)
LCD_D4  (1 unrouted)
LCD_D5  (1 unrouted)
LCD_D6  (1 unrouted)
LCD_D7  (1 unrouted)
LCD_E  (1 unrouted)
LCD_RS  (1 unrouted)
N$1  (1 unrouted)
N$2
  Top 0.305: 35.56,18.54 35.05,18.54
N$3  (1 unrouted)
N$4
  Top 0.813: U$2.P$1 20.66,10.97 F1.1
N$5
  Top 0.813: D8.A 26.42,15.43 F1.2 23.37,15.34 23.37,8.89 25.43,6.83 R1.1
N$6
  Top 0.305: C4.1 49.46,9.89 U$18.1
N$7  (3 unrouted)
N$8  (1 unrouted)
N$9  (1 unrouted)
N$10  (1 unrouted)
N$11  (1 unrouted)
N$12  (1 unrouted)
N$13  (1 unrouted)
N$14  (2 unrouted)
N$15  (2 unrouted)
N$16  (3 unrouted)
N$17  (1 unrouted)
N$18  (via drill 0.5)
  Top 0.406: C4.2 v48.26,6.86
  Top 0.61: U$18.3 arc90 52.07,9.96 52.07,4.57 arc90 53.2,3.44 54.61,3.44 | 54.61,3.44 D1.C 61.9,3.44 L1.P$1 | 54.61,3.44 54.61,2.54 48.77,2.54 48.26,3.05 v48.26,4.06
  Bottom 0.406: v48.26,6.86 v48.26,4.06
N$19
  Top 0.61: U$18.5 53.47,17.64 R50.1 R49.2
N$20
  Top 0.813: 330R.2 64.52,16.46 LED14.A
N$21  (1 unrouted)
N$22
  Top 0.813: C17.1 38.02,18.62 38.86,17.78 38.86,15.75 38.42,15.31 U3.3
N$23
  Top 0.61: U$18.6 52.2,17.16 C53.2
N$24
  Top 1.016: U3.2 39.69,14.04 L3.P$1 40.22,12.03 38.81,10.62 D4.C
N$25
  Top 0.813: R8.1 31.38,18.63 R9.1 31.4,16.98 U3.5
N$26  (1 unrouted)
N$27  (1 unrouted)
N$28  (1 unrouted)
N$29  (1 unrouted)
N$30  (1 unrouted)
N$31  (1 unrouted)
N$32
  Top 0.61: C53.1 50.51,19.54 R51.1
N$33  (2 unrouted)
N$34  (1 unrouted)
N$35  (2 unrouted)
N$36  (2 unrouted)
N$37  (1 unrouted)
N$38  (2 unrouted)
N$39  (1 unrouted)
N$40  (2 unrouted)
N$41  (1 unrouted)
N$42  (1 unrouted)
N$43  (1 unrouted)
N$44  (1 unrouted)
N$45  (3 unrouted)
N$46  (1 unrouted)
N$47  (2 unrouted)
N$48  (2 unrouted)
N$49  (2 unrouted)
N$50  (3 unrouted)
N$51  (1 unrouted)
N$52  (1 unrouted)
N$53  (1 unrouted)
N$54  (1 unrouted)
N$55  (1 unrouted)
N$56  (1 unrouted)
N$57  (1 unrouted)
N$58  (1 unrouted)
N$59  (1 unrouted)
N$60  (1 unrouted)
N$61  (1 unrouted)
N$62  (2 unrouted)
N$63  (2 unrouted)
N$64  (2 unrouted)
N$65  (2 unrouted)
N$66  (1 unrouted)
N$67  (1 unrouted)
N$69  (1 unrouted)
N$70  (1 unrouted)
N$71  (1 unrouted)
N$72  (1 unrouted)
N$73  (1 unrouted)
N$74  (1 unrouted)
N$75  (1 unrouted)
N$77  (2 unrouted)
N$78  (1 unrouted)
N$80  (1 unrouted)
N$82  (1 unrouted)
N$86  (via drill 0.5)
  other vias: 54.61,7.87
N$87  (1 unrouted)
N$117  (via drill 0.5)
  other vias: 24.64,2.54
RX1+  (1 unrouted)
RX1-  (1 unrouted)
RX1_CT  (3 unrouted)
RX2+  (1 unrouted)
RX2-  (1 unrouted)
RX2_CT  (3 unrouted)
SPI1_MISO  (2 unrouted)
SPI1_MOSI  (2 unrouted)
SPI1_SCK  (2 unrouted)
SPI1_SS1_ETH1  (2 unrouted)
SPI2_MISO  (3 unrouted)
SPI2_MOSI  (3 unrouted)
SPI2_SCK  (3 unrouted)
SPI2_SS1_ETH2  (2 unrouted)
SPI2_SS2_FLASH  (2 unrouted)
SW0  (2 unrouted)
SW1  (2 unrouted)
SW2  (2 unrouted)
SW3  (2 unrouted)
SWDCLK  (1 unrouted)
SWDIO  (1 unrouted)
TX1+  (2 unrouted)
TX1-  (2 unrouted)
TX1_CT  (2 unrouted)
TX2+  (2 unrouted)
TX2-  (2 unrouted)
TX2_CT  (2 unrouted)
UART_RX1  (1 unrouted)
UART_RX2  (2 unrouted)
UART_TX1  (1 unrouted)
UART_TX2  (2 unrouted)
USB_D+  (2 unrouted)
USB_D-  (1 unrouted)
VBAT  (1 unrouted)
VIN
  Top 0.813: D8.C 29.38,10.75 R7.2 | C15.+ 30.73,8.39 29.97,9.14 29.97,11.16 R7.2 | R7.2 29.88,15.14 30.04,15.31 U3.6
VIN2
  Top 0.813: U3.7 U3.8 | U3.8 31.81,11.32 R7.1 | U3.8 U3.1
  pour Top (no thermals): 30.73,14.48 35.56,14.48 35.56,13.72 38.61,13.72 38.61,11.94 30.73,11.94

## Text on the board
tPlace: DI6 | DI4 | DI1 | DI0 | DI7 | DI5 | DI3 | DI2 | R0 | RS232 | SWD1 | SWD | Exp Slot | SWCK | GND | SniperBoard / v1.0 | S4 | R1 | TX2 | RX2 | I2C | Reset | GND | DAT | CK | GND | SWD0 | GND | SWCK | SWD | R2 | S1 | S2 | USB | TX1 | RX1 | SCK2 | SO2 | SI2 | SS2F | SS2E | GND | GND | MAC0 | R3 | CR2032 | SS1E | SI1 | MAC1 | SO1 | SCK1 | 24V DC | 3.3V